# Altium PCB 388D_Control_v1_PCB1_1.PcbDoc (part 2 of 5)
Units mil, origin at the board's own origin, x right, y up, seen from the top; angles counter-clockwise.
Board outline 3431 x 3800 mil, 6 copper layers (Top Layer, Singal Layer 2, Signal layer 3, Signal Layer 4, Signal Layer 5, Bottom Layer), stack 32.7 mil thick; 270 components, 383 nets, 1462 pads, 899 vias.
Unrouted connection lines stored in the file: 19.
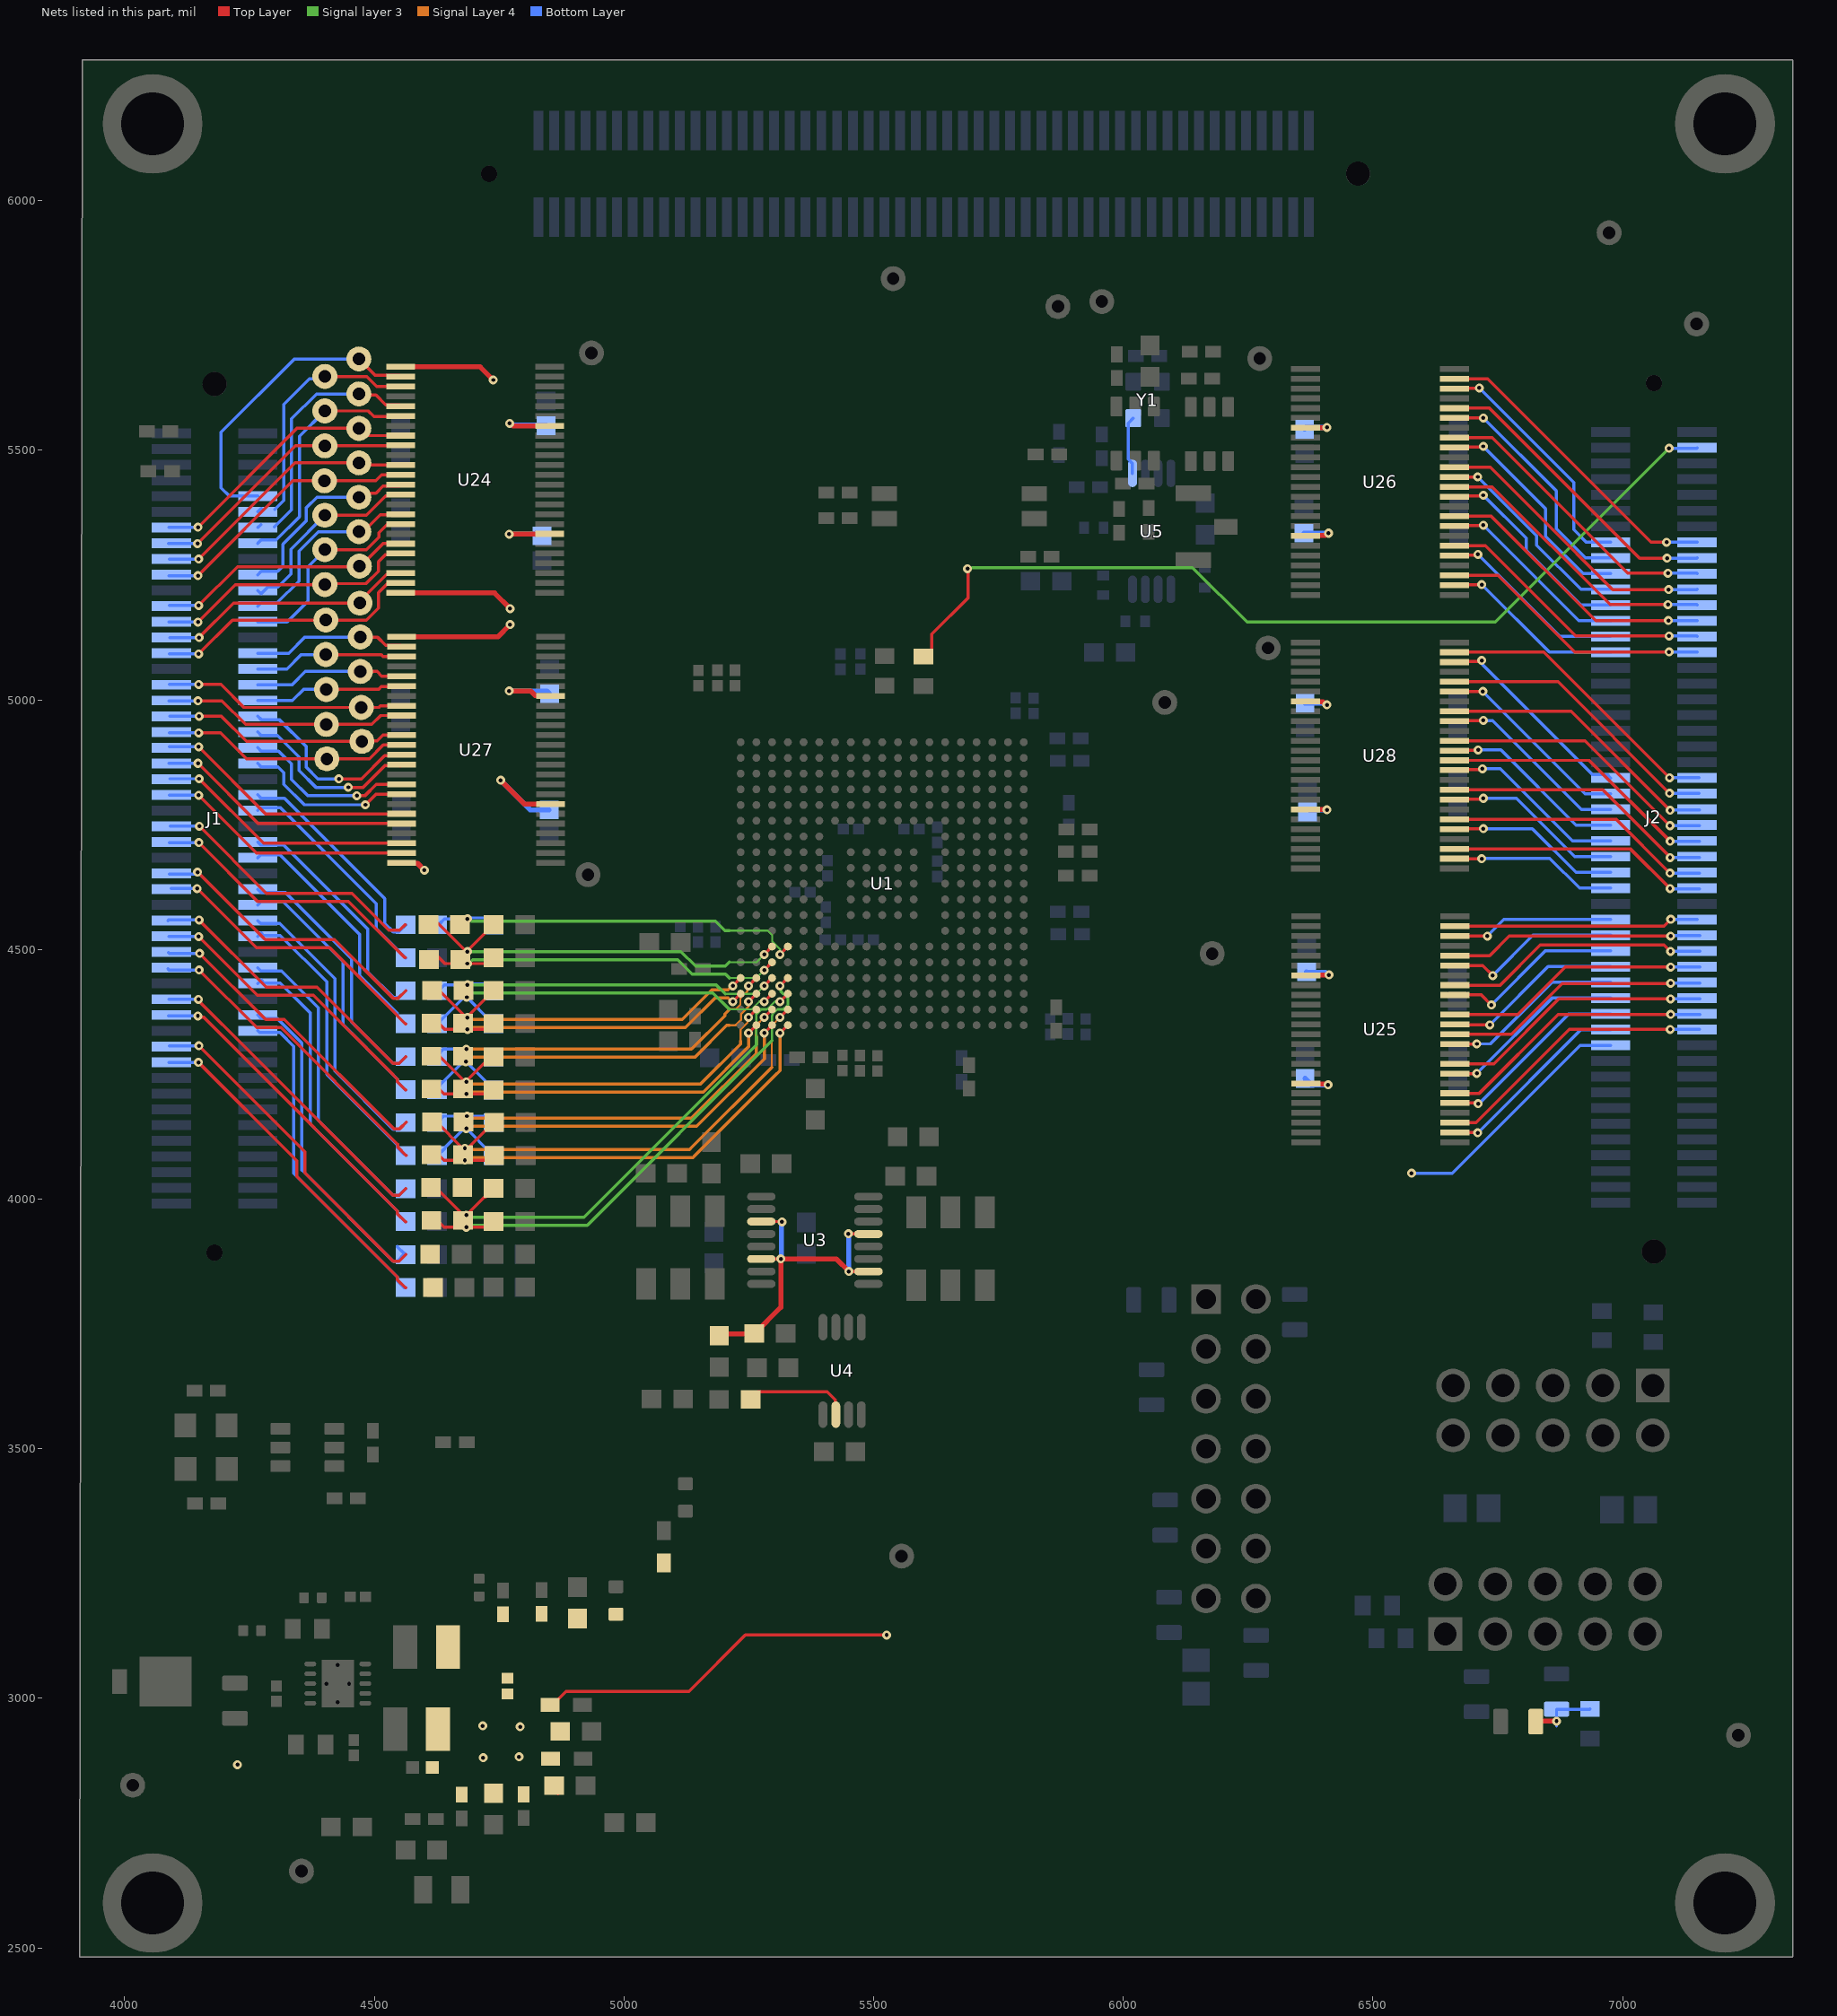
[diagram p5: the nets of this part, all layers, seen from the top]

## Part data
C1 C2 C3 C4 C5 C6 C7 C8 C9 C10 C11 C12 C13 C14 C15 C16 C17 C18 C19 C20 C21 C22 C23 C24: library part CMP-0006920-4, "CAP, CERM, 330 pF, 50 V, +/- 5%, C0G/NP0, 0603"
C25 C30: library part CMP-0006862-5, "CAP, CERM, 0.1 uF, 10 V, +/- 10%, X7R, 0603"
C26 C27 C28 C29 C35 C37: library part CMP-0007324-5, "CAP, CERM, 22 uF, 10 V, +/- 20%, X5R, 0603"
C31: library part CMP-0006907-5, "CAP, CERM, 2.2 uF, 6.3 V, +/- 10%, X5R, 0603"
C32 C33 C34: library part CMP-0006871-4, "CAP, CERM, 1 uF, 6.3 V, +80/-20%, Y5V, 0603"
C36: library part CMP-0006213-2, "CAP, CERM, 33 pF, 25 V, +/- 5%, C0G/NP0, 0402"
C38 C40 C41 C44 C45 C46 C47 C48 C49 C50 C51 C52 C55 C56 C57 C58 C59 C60 C61 C62 C63 C64 C65 C66 C67 C68 C69 C70: library part CMP-001-00001-6, "Chip Capacitor, 0.1 uF, +/- 5%, 16 V, 0402 (1005 Metric)"
C39: library part CMP-001-00081-4, "Chip Capacitor, 22レF +/-40%, 16V, 0805, Thickness 1.45 mm"
C42 C43 C53 C54: library part CMP-0006906-5, "CAP, CERM, 2.2 uF, 10 V, +/- 10%, X5R, 0603"
C71 C72: library part CMP-001-00075-4, "Chip Capacitor, 10レF +/-20%, 10V, 0603, Thickness 1 mm"
C73 C75 C77 C78: library part CMP-0006343-2, "CAP, CERM, 0.1 uF, 10 V, +/- 10%, X7R, 0402"
C74 C76: library part CMP-0006236-2, "CAP, CERM, 0.01 uF, 50 V, +/- 5%, X7R, 0402"
C163 C164 C165: library part CMP-001-00007-7, "Chip Capacitor, 1 uF, +/- 10%, 50 V, 0805 (2012 Metric)"
C166 C167 C168 C169 C170 C171 C172 C173 C174 C175 C176 C177 C178 C179 C180 C181 C182 C183 C184 C185: library part CMP-001-00017-6, "Chip Capacitor, 100 nF, +/- 10%, 50 V, 0603 (1608 Metric)"
D1: "Diode, Schottky, 10 V, 1 A, AEC-Q101, POWERMITE"
D2: library part CMP-004-00069-1, "SURFACE MOUNT SILICON LOW VF SCHOTTKY DIODE 0.5 AMP"
D3 D4: library part CMP-0002951-3, "LED, Red, SMD"
J1 J2 J12: library part CMP-002-00178-1, "Socket(male) 100 Positions, Dual Row, Vertical Receptacle. BergStak Lite 0.80mm, Board-to-Board Connector,"
J9 J10: library part CMP-002-00158-1, "10 Positions Header Connector 0.100\" (2.54mm) Through Hole Gold"
J11: library part CMP-002-00182-1, "Connector Header Through Hole 14 position 0.100 (2.54mm)"
L1 L2: library part CMP-006-00009-6, "Chip Inductor, 2.2 uH, +/- 20%, -55 to 125 degC, 1008 (2520 Metric), RoHS, Tape and Reel"
L3 L4 L5: library part CMP-006-00004-3, "Chip Ferrite Bead for General Use, 120 Ohm, 500 mA, -55 to 125 degC, 0603 (1608 Metric), RoHS, Tape and Reel"
LED1: library part CMP-007-00038-1, "WL-SMCW SMT Mono-Color Chip LED Waterclear 0805"
R3 R4 R5 R6 R7 R8 R59: library part CMP-0026916-3, "RES, 39, 5%, 0.063 W, AEC-Q200 Grade 0, 0402"
R9 R10 R11 R12 R13 R14 R15 R16 R17 R18 R19 R20 R21 R22 R23 R24 R25 R26 R27 R28 R29 R30 R31 R32 R33 R34 R35 R36 R41 R42 R72 R73 R76 R85: library part CMP-0025697-4, "RES, 0, 5%, 0.1 W, AEC-Q200 Grade 0, 0603"
R37 R38 R39 R40: library part CMP-0078660-1, "RES, 0.1, 1%, 0.25 W, 0402"
R43: library part CMP-0022895-5, "RES, 1.00 k, 1%, 0.1 W, 0603"
R44: library part CMP-009-00005-5, "Chip Resistor, 0 Ohm, 0.1 W, -55 to 155 degC, 0402 (1005 Metric)"
R45: library part CMP-009-00081-2, "22K 0.063W 1% 0402 (1005 Metric)  SMD"
R46 R163 R164 R165 R166 R167 R168 R169: library part CMP-009-00006-5, "Chip Resistor, 0 Ohm, 0.1 W, -55 to 155 degC, 0603 (1608 Metric)"
R47 R66 R67: library part CMP-0026962-3, "RES, 680, 5%, 0.063 W, AEC-Q200 Grade 0, 0402"
R48: library part CMP-0026300-2, "RES, 340 k, 1%, 0.063 W, AEC-Q200 Grade 0, 0402"
R49: library part CMP-0026676-1, "RES, 2.00 k, 1%, 0.1 W, AEC-Q200 Grade 0, 0402"
R50: library part CMP-0026160-2, "RES, 205 k, 1%, 0.063 W, AEC-Q200 Grade 0, 0402"
R51: library part CMP-009-00066-2, "10K 0.063W 1% 0402 (1005 Metric)  SMD"
R52: library part CMP-009-00023-5, "Chip Resistor, 100 KOhm, +/- 1%, 0.1 W, -55 to 155 degC, 0603 (1608 Metric)"
R53: library part CMP-009-00163-3, "Chip Resistor, 200 kOhms, +/-1 %, 63 mW, -55 to 155 degC, 0402"
R54: library part CMP-0025557-3, "RES, 75.0 k, 0.5%, 0.1 W, 0603"
R55: library part CMP-0026950-3, "RES, 56, 5%, 0.063 W, AEC-Q200 Grade 0, 0402"
R62 R63 R68 R71 R79 R80: library part CMP-0026890-5, "RES, 2.2 k, 5%, 0.063 W, AEC-Q200 Grade 0, 0402"
R64: library part CMP-0078669-1, "RES, 10.0 k, 1%, 0.063 W, 0402"
R69 R70: library part CMP-0026863-2, "RES, 1.5 M, 5%, 0.063 W, AEC-Q200 Grade 0, 0402"
R74 R75: library part CMP-0026949-3, "RES, 56 k, 5%, 0.063 W, AEC-Q200 Grade 0, 0402"
R77 R78 R81 R83: library part CMP-0026765-1, "RES, 10.0, 0.1%, 0.063 W, 0402"
R82 R84 R86: library part CMP-0081856-1, "RES, 0, 0%, 0.2 W, AEC-Q200 Grade 0, 0402"
R158 R159 R162 R170 R171 R172 R173 R174 R175: library part CMP-009-00174-4, "Chip Resistor, 4,7 Ohms, +/-5 %, 125 mW, -55 to 155 degC, 0805"
R176 R177: library part CMP-0026938-5, "RES, 4.7 k, 5%, 0.063 W, AEC-Q200 Grade 0, 0402"
S1 S2: library part CMP-0002233-1, "Switch, Dual SPDT,  2 Pos, 0.1A, 6VDC, SMD"
S3: library part CMP-0002193-2, "Switch, SPST-NO, Off-Mom, 12 V, SMD"
S4: library part CMP-0002230-1, "Switch, SPST, 2 Pos, 25mA, 24VDC, SMD"
TP1 TP2 TP3 TP4 TP5 TP6 TP7 TP8 TP9 TP10 TP15 TP16 TP17 TP18 TP19 TP20 TP21 TP22 TP23 TP24 TP25 TP26 TP27 TP28 TP29 TP30 TP31 TP32 TP33 TP34 TP35 TP36 TP37 TP38 TP39 TP40 TP41 TP42 TP43: library part CMP-0078143-3, "TEST POINT.  No entry in BOM."
U1: library part CMP-012-000147-1, "TMS320F28388DZWTS, ZWT0337A (NFBGA-337)"
U2: library part CMP-0051789-2, "Dual Buffer/Driver with Open-Drain Output, DBV0006A, LARGE T&R"
U3: library part CMP-014-00004-2, "High-Speed, Single-Supply, Rail-to-Rail Operational Amplifier MicroAmplifier(TM) Series, 2.7 to 5.5 V, -55 to 150 degC, 16-pin SOP (DBQ16), Green (RoHS & no Sb/Br)"
U4: library part CMP-0032596-2, "Low Noise, Very Low Drift, Precision Series Voltage Reference, DGK0008A (VSSOP-8)"
U5: library part CMP-052-000006-1, "Low Jitter, 1:4 LVCMOS Fan-out Clock Buffer, PW0008A (TSSOP-8)"
U6 U7: library part CMP-052-000005-1, "High-Accuracy, Fixed-Threshold OV/UV Monitor, DDC0006A (SOT-23-T-6)"
U8: library part CMP-014-000012-1, "Dual, Adjustable, 600mA and 1000mA, 2.25MHz Step-Down Converter with 1-Wire Interface in QFN 10-VSON -40 to 85"
U24 U25 U26 U27 U28: library part CMP-031-00095-1, "16-Bit Dual-Supply Bus Transceiver"
Y1: library part CMP-052-000000-1, "Oscillator, 25 MHz, 15 pF, SMD"

## Free pads (board coordinates)
  round 200 hole 126 unplated: 2(4056,2590) 2(4056,6154) 2(7205,2590) 2(7205,6154)

## Via types
v1: diameter 18, hole 8, Top Layer to Bottom Layer, tented both sides, 899 vias

## Nets (pads, with @x,y where several pads share a name; then routed paths per layer and width w, separated by ;. In a path a pad name is that pad's centre, name@x,y a point inside that pad or via, vN(x,y) a via of type N, cw(c..) or ccw(c..) an arc to the next point about the centre after c; other vN are vias at no path point)
1V2: C36.1 C37.1 C71.2 D2.2 L2.2 L5.1 R50.2
3V3: C35.1 C42.1 C53.1 C170.1 C171.1 C172.1 C173.1 C178.1 C179.1 C180.1 C181.1 C184.1 C185.1 D2.1 J2.21 L1.2 L3.1 L4.1 R44.2 R47.2 R48.2 U24.1 U24.24 U24.31 U24.42 U25.31 U25.42 U26.31 U26.42 U27.1 U27.24 U27.31 U27.42 U28.31 U28.42 | length 3235.1
  Top Layer w6.25: C53.1@4851,2825.5 4851.98,2825.5 4867.56,2809.92 C53.1@4867.56,2808.94 ; L3.1@4852.02,2987 4856.94,2987 4883.94,3014 5130,3014 5243,3127 v1(5526,3127)
  Top Layer w10: U24.24@4552.72,5214.59 4553.02,5214.3 4740.7,5214.3 v1(4771.9,5183.1) v1@4772,5183 ; U24.1@4552.9,5667.17 4711.83,5667.17 v1(4738,5641) ; U27.24@4554.71,4673.54 4555.62,4672.64 4586.47,4672.64 v1(4600.01,4659.1) ; U27.1@4554.71,5126.3 4747.3,5126.3 v1(4772,5151) ; v1(4753,4839) 4800.34,4791.66 U27.31@4852.98,4791.65 ; v1(4770,5018) 4813,5018 4821.9,5009.1 4852.08,5009.1 U27.42@4852.98,5008.19 ; v1(4770,5332) 4770.35,5332.35 4850.24,5332.35 U24.31@4850.59,5332.7 ; v1(4771,5554) 4773.16,5554 4777.93,5549.24 4848.91,5549.24 U24.42@4848.98,5549.17 ; U28.31@6364.42,4996.74 6365.02,4996.15 6399.69,4996.15 6405.84,4990 v1(6408,4990) ; U28.42@6364.87,4780.52 6365.13,4780.26 6407.74,4780.26 v1(6408,4780) ; U26.31@6364.87,5545.05 6365.24,5545.42 6407.64,5545.42 v1(6408.01,5545.78) ; U26.42@6365.46,5328.52 6366.37,5329.42 6404.16,5329.42 6408.84,5334.1 v1(6411.01,5334.1) ; U25.42@6365.74,4231.82 6366.65,4230.92 6405.92,4230.92 6407.84,4229 v1(6410,4229) ; U25.31@6366.11,4448.73 6411.64,4448.73 v1(6412.01,4449.1)
  Bottom Layer w6.25: v1(6577,4052) 6659,4052 6915.21,4308.21 J2.21@6976.01,4308.21
  Bottom Layer w10: v1(4753,4839) 4812.39,4779.61 C173.1@4850,4779.61 ; v1(4770,5018) 4845.5,5018 C172.1@4851.01,5012.5 ; v1(4770,5332) C170.1@4842.72,5332 ; v1(4771,5554) 4773.16,5554 4776.16,5551 4842.5,5551 C171.1@4844.01,5549.5 ; C179.1@6362.01,5334.18 6362.08,5334.1 v1(6411.01,5334.1) ; C178.1@6363.01,5542.39 6366.4,5545.78 v1(6408.01,5545.78) ; C185.1@6364.01,4241.78 6376.79,4229 v1(6410,4229) ; C180.1@6364.01,4993.39 6402.45,4993.39 6405.84,4990 v1(6408,4990) ; C184.1@6367.01,4455.18 6368.08,4454.1 6404.84,4454.1 6409.84,4449.1 v1(6412.01,4449.1) ; C181.1@6373.19,4780 v1(6408,4780)
  other v1: 4226,2867 4718,2881 4790,2883 4792,2943 4717,2945
25MHZ_CLK: U5.1 Y1.3 | length 118.3
  Bottom Layer w6.25: U5.1@6018.46,5453.94 6018.46,5473.57 6010,5482.03 6010,5554.41 Y1.3@6020.12,5564.53
1415_N: C4.1 R18.1 U1.U4 | length 1023.9
  Top Layer w6: 4625.09,4020.68 4626.07,4020.68 4676.6,3970.15 4682.02,3970.15 v1(4684.32,3967.86) 4720.66,4004.21 4722.65,4004.21 C4.1@4738.35,4019.91
  Top Layer w6.25: v1(5312.45,4395.77) U1.U4@5328.2,4411.52
  Signal layer 3 w4: 5284.09,4380.1 5284.76,4380.77 5287.17,4380.77 5302.17,4395.77 v1(5312.45,4395.77)
  Signal layer 3 w4.74: 5264.83,4325.34 5264.83,4370.95
  Signal layer 3 w5.33: 5264.83,4370.95 5273.82,4379.94 5283.93,4379.94 5284.09,4380.1
  Signal layer 3 w6.25: v1(4684.32,3967.86) 4686.56,3965.61 4692.22,3965.61 4693.85,3963.98 4919.91,3963.98 5264.83,4308.91 5264.83,4325.34
1415_P: C16.1 R17.1 U1.T4 | length 1054
  Top Layer w6.25: 4625.18,3958.32 4639.65,3943.86 v1(4684.32,3943.86) 4726.02,3943.86 C16.1@4740.84,3958.67 ; v1(5312.45,4427.27) U1.T4@5328.2,4443.01
  Signal layer 3 w4: 5296.7,4366.93 5297.45,4367.67 5297.45,4370.49 5306.99,4380.02 5307.81,4380.02
  Signal layer 3 w4.49: 5296.7,4317.8 5296.7,4366.93
  Signal layer 3 w5.5: 5307.81,4380.02 5318.98,4380.02 5328.2,4389.25 5328.2,4402.83
  Signal layer 3 w6.25: v1(4684.32,3943.86) 4686.56,3946.11 4692.22,3946.11 4693.85,3947.73 4926.64,3947.73 5296.7,4317.8 ; v1(5312.45,4427.27) 5314.35,4425.36 5314.35,4415.68 5318.14,4411.89 5319.13,4411.89 5328.2,4402.83
A0A1_N: C1.1 R11.1 U1.T1 | length 745.4
  Top Layer w6: 4628.17,4420.41 4628.17,4419.86 4684.17,4363.86 v1(4686.32,4363.86) 4686.32,4365.54 4741.59,4420.81 C1.1@4741.86,4420.81
  Top Layer w6.25: v1(5217.97,4427.27) U1.T1@5233.71,4443.01
  Signal Layer 4 w6.25: v1(4686.32,4363.86) 4688.56,4361.61 4694.22,4361.61 4695.85,4359.98 5116.4,4359.98 5176.06,4419.64 5208.43,4419.64 5216.05,4427.27 v1(5217.97,4427.27)
A0A1_P: C13.1 R10.1 U1.U1 | length 711.2
  Top Layer w6.25: 4627.18,4354.32 4641.65,4339.86 v1(4686.32,4339.86) 4728.02,4339.86 C13.1@4742.84,4354.67 ; v1(5217.97,4395.77) U1.U1@5233.71,4411.52
  Signal Layer 4 w6.25: v1(4686.32,4339.86) 4688.56,4342.11 4694.22,4342.11 4695.85,4343.73 5123.13,4343.73 5182.79,4403.39 5208.43,4403.39 5216.05,4395.77 v1(5217.97,4395.77)
A2A3_N: C2.1 R13.1 U1.T2 | length 771.4
  Top Layer w6.25: v1(5249.46,4427.27) U1.T2@5265.21,4443.01
  Signal Layer 4 w4: 5210.99,4380.1 5211.66,4380.77 5224.18,4380.77 5232.97,4389.56 5232.97,4402.08 5247.2,4416.31 5247.2,4425 v1@5247.56,4425.36
  Signal Layer 4 w6.25: v1(4684.43,4300.32) 5135.05,4300.32 5201.84,4367.11 5201.84,4370.95 5210.99,4380.1 ; v1@5247.56,4425.36 v1(5249.46,4427.27)
  Bottom Layer w6: v1(4684.43,4300.32) 4718.15,4300.32 4718.33,4300.14 4722.87,4300.14 C2.1@4735.39,4287.62
  Bottom Layer w6.25: R13.1@4628.14,4289.94 4638.52,4300.32 v1(4684.43,4300.32)
A2A3_P: C14.1 R12.1 U1.U2 | length 809
  Top Layer w6.25: v1(5249.46,4395.77) U1.U2@5265.21,4411.52
  Signal Layer 4 w4: 5223.88,4348.98 5234.09,4359.18
  Signal Layer 4 w4.54: 5234.09,4359.18 5234.09,4370.5 5249.46,4385.87 v1(5249.46,4395.77)
  Signal Layer 4 w4.74: 5211.29,4348.15 5223.05,4348.15 5223.88,4348.98
  Signal Layer 4 w6.25: v1(4683.32,4275.47) 4684.25,4275.47 4692.85,4284.07 5141.78,4284.07 5205.98,4348.27 5211.16,4348.27 5211.29,4348.15
  Bottom Layer w6: R12.1@4625.06,4222.92 4675.31,4273.17 4681.02,4273.17 v1(4683.32,4275.47) 4733.11,4225.67 C14.1@4740.84,4225.67
A4A5_N: C3.1 R15.1 U1.T3 | length 729.9
  Top Layer w6.25: v1(5280.96,4427.27) U1.T3@5296.7,4443.01
  Signal layer 3 w4: 5202.82,4411.09 5264.78,4411.09 v1(5280.96,4427.27)
  Signal layer 3 w6.25: v1(4686.43,4429.32) 5184.59,4429.32 5202.82,4411.09
  Bottom Layer w6: v1(4686.43,4429.32) 4688.54,4431.43 4721.19,4431.43 C3.1@4723.04,4433.29
  Bottom Layer w6.25: R15.1@4630.14,4418.94 4640.52,4429.32 v1(4686.43,4429.32)
A4A5_P: C15.1 R14.1 U1.U3 | length 800.5
  Top Layer w6.25: v1(5280.96,4395.77) U1.U3@5296.7,4411.52
  Signal layer 3 w4: 5210.53,4380.4 5256.07,4380.4 5271.44,4395.77 v1(5280.96,4395.77)
  Signal layer 3 w6.25: v1(4685.32,4404.47) 4686.25,4404.47 4694.85,4413.07 5177.86,4413.07 5210.53,4380.4
  Bottom Layer w6: R14.1@4626.07,4351.92 4627.06,4351.92 4677.31,4402.17 4683.02,4402.17 v1(4685.32,4404.47) 4735.11,4354.67 C15.1@4742.84,4354.67
ADC_3V0_REF: R42.2 U4.6 | length 221.4
  Top Layer w6.25: R42.2@5253.45,3598.9 5268.55,3614 5406.96,3614 5422.88,3598.08 5422.88,3560.67 U4.6@5424.09,3559.46
ADC_A0A1_N: J1.58 R11.2 | length 585.4
  Top Layer w6.25: v1(4146.01,4655.1) 4281.42,4519.69 4420.42,4519.69 4537.52,4402.59 4548.09,4402.59 4562.92,4417.42
  Bottom Layer w6.25: J1.58@4089.9,4651.1 4138.83,4651.1 4142.83,4655.1 v1(4146.01,4655.1)
ADC_A0A1_P: J1.60 R10.2 | length 583
  Top Layer w6.25: v1(4145.01,4622.1) 4263.67,4503.44 4410.76,4503.44 4546.36,4367.85 4546.36,4366.93 4562.22,4351.06 4563.14,4351.06
  Bottom Layer w6.25: J1.60@4092.9,4622.1 v1(4145.01,4622.1)
ADC_A2A3_N: J1.59 R13.2 | length 520
  Bottom Layer w6.25: J1.59@4266.7,4620.93 4273.41,4614.21 4321.9,4614.21 4454.01,4482.1 4454.01,4355.78 4537.52,4272.27 4549.9,4272.27 R13.2@4562.92,4285.28
ADC_A2A3_P: J1.61 R12.2 | length 532.4
  Bottom Layer w6.25: J1.61@4266.7,4589.43 4273.37,4596.1 4317.01,4596.1 4437.01,4476.1 4437.01,4349.8 4530.79,4256.02 4546.36,4240.45 4546.36,4234.77 4561.91,4219.22 R12.2@4562.92,4219.19
ADC_A4A5_N: J1.53 R15.2 | length 480.9
  Bottom Layer w6.25: J1.53@4266.7,4715.41 4273.01,4709.1 4319.01,4709.1 4487.01,4541.1 4487.01,4454.93 4537.52,4404.42 4549.92,4404.42 R15.2@4562.92,4417.42
ADC_A4A5_P: J1.55 R14.2 | length 490.5
  Bottom Layer w6.25: J1.55@4266.7,4683.92 4272.88,4690.1 4273.65,4689.33 4311.78,4689.33 4470.76,4530.35 4470.76,4448.2 4546.36,4372.6 4546.36,4366.93 4561.93,4351.35 R14.2@4562.92,4351.35
ADC_B0B1_N: J1.66 R20.2 | length 604.5
  Top Layer w6.25: v1(4148.01,4526.1) 4265.63,4408.48 4378.33,4408.48 4529.81,4257 4546.36,4240.45 4546.36,4234.77 4561.93,4219.19 4562.92,4219.19
  Bottom Layer w6.25: J1.66@4088.9,4526.1 v1(4148.01,4526.1)
ADC_B0B1_P: J1.64 R19.2 | length 600.6
  Top Layer w6.25: v1(4149.01,4559.1) 4283.38,4424.73 4385.06,4424.73 4537.52,4272.27 4549.91,4272.27 4562.92,4285.28
  Bottom Layer w6.25: J1.64@4086.9,4558.1 4087.9,4559.1 v1(4149.01,4559.1)
ADC_B2B3_N: J1.65 R22.2 | length 590.6
  Bottom Layer w6.25: J1.65@4266.7,4526.44 4273.41,4533.15 4278.22,4528.35 4311.78,4528.35 4404.76,4435.37 4404.76,4249.93 4530.11,4124.58 4546.36,4108.33 4546.36,4102.66 R22.2@4558.98,4090.05
ADC_B2B3_P: J1.63 R21.2 | length 583.3
  Bottom Layer w6.25: J1.63@4266.7,4557.93 4272.44,4552.19 4310.92,4552.19 4421.01,4442.1 4421.01,4256.66 4537.52,4140.15 4549.92,4140.15 R21.2@4562.92,4153.15
ADC_B4B5_N: J1.70 R24.2 | length 634.9
  Top Layer w6.25: v1(4149.01,4459.1) 4264.63,4343.48 4313.21,4343.48 4531.13,4125.55 4543.72,4112.96 4547.38,4109.3 4547.38,4103.62 4562.96,4088.04 4563.94,4088.04
  Bottom Layer w6.25: J1.70@4086.9,4461.1 4088.9,4459.1 v1(4149.01,4459.1)
ADC_B4B5_P: J1.68 R23.2 | length 627.6
  Top Layer w6.25: v1(4150.01,4492.1) 4282.38,4359.73 4319.94,4359.73 4538.54,4141.12 4550.93,4141.12 4563.94,4154.13
  Bottom Layer w6.25: J1.68@4087.9,4494.1 4089.9,4492.1 v1(4150.01,4492.1)
ADC_C2C3_N: J1.52 R27.2 | length 562.1
  Top Layer w6.25: v1(4149.59,4747.1) 4283.96,4612.73 4455.05,4612.73 4529.18,4538.6 4550.51,4538.6 4561.9,4549.98
  Bottom Layer w6.25: J1.52@4090.9,4747.1 v1(4149.59,4747.1)
ADC_C2C3_P: J1.54 R26.2 | length 567.3
  Top Layer w6.25: v1(4148.59,4714.1) 4266.21,4596.48 4448.32,4596.48 4560.91,4483.89 4561.9,4483.89
  Bottom Layer w6.25: J1.54@4089.9,4714.1 v1(4148.59,4714.1)
ADC_C4C5_N: J1.47 R29.2 | length 444.9
  Bottom Layer w6.25: J1.47@4266.7,4809.9 4273.41,4803.18 4306.52,4803.18 4306.6,4803.1 4320.01,4803.1 4521.01,4602.1 4521.01,4552.1 4537.52,4535.59 4548.96,4535.59 R29.2@4562.92,4549.55
ADC_C4C5_P: J1.49 R28.2 | length 452.8
  Bottom Layer w6.25: J1.49@4266.7,4778.4 4272.39,4784.1 4312.01,4784.1 4504.01,4592.1 4504.01,4542.39 4546.36,4500.04 4546.36,4499.06 4561.93,4483.48 R28.2@4562.92,4483.48
ADC_D0D1_N: J1.71 R32.2 | length 632.9
  Bottom Layer w6.25: J1.71@4266.7,4431.95 4273.41,4438.67 4279.03,4433.05 4311.78,4433.05 4371.76,4373.08 4371.76,4150.8 4542.7,3979.86 4546.36,3976.2 4546.36,3970.53 4561.93,3954.96 R32.2@4562.92,3954.96
ADC_D0D1_P: J1.69 R31.2 | length 622.4
  Bottom Layer w6.25: J1.69@4266.7,4463.44 4273.04,4457.1 4314.01,4457.1 4388.01,4383.1 4388.01,4157.53 4537.52,4008.02 4549.92,4008.02 R31.2@4562.92,4021.02
ADC_D2D3_N: J1.77 R34.2 | length 659.9
  Bottom Layer w6.25: J1.77@4266.7,4337.46 4270.46,4333.7 4311.08,4333.7 4338.76,4306.02 4338.76,4051.66 4342.14,4048.27 4530.11,3860.31 4546.36,3844.06 4546.36,3836.41 R34.2@4559.97,3822.8
ADC_D2D3_P: J1.75 R33.2 | length 677.5
  Bottom Layer w6.25: J1.75@4266.7,4368.96 4273.41,4362.24 4305.52,4362.24 4355.01,4312.75 4355.01,4058.39 4358.39,4055 4537.52,3875.88 4546.36,3875.88 4559.97,3889.49 R33.2@4559.97,3890.86 ; R33.2@4546.36,3905.45 4546.36,3904.47 R33.2@4559.97,3890.86 ; R33.2@4562.92,3888.89 4560.95,3890.86 R33.2@4559.97,3890.86
ADC_D4D5_N: J1.82 R36.2 | length 682.6
  Top Layer w6.25: v1(4147.59,4274.1) 4344.76,4076.93 4344.76,4045.67 4529.81,3860.62 4546.36,3844.07 4546.36,3838.4 4561.93,3822.83 4562.92,3822.83
  Bottom Layer w6.25: J1.82@4088.9,4274.1 v1(4147.59,4274.1)
ADC_D4D5_P: J1.80 R35.2 | length 681.8
  Top Layer w6.25: v1(4148.59,4307.1) 4361.01,4094.68 4361.01,4052.4 4537.52,3875.89 4549.92,3875.89 4562.92,3888.89
  Bottom Layer w6.25: J1.80@4089.9,4307.1 v1(4148.59,4307.1)
ADC_IN1415_N: J1.74 R18.2 | length 643.1
  Top Layer w6.25: v1(4147.59,4400.1) 4147.59,4397.94 4246.59,4298.94 4537.52,4008.01 4549.91,4008.01 4562.92,4021.02
  Bottom Layer w6.25: J1.74@4088.9,4400.1 v1(4147.59,4400.1)
ADC_IN1415_P: J1.76 R17.2 | length 649.1
  Top Layer w6.25: v1(4146.59,4367.1) 4148.84,4364.85 4157.69,4364.85 4230.34,4292.21 4530.79,3991.76 4542.7,3979.85 4546.36,3976.19 4546.36,3970.51 4561.93,3954.93 4562.92,3954.93
  Bottom Layer w6.25: J1.76@4087.9,4367.1 v1(4146.59,4367.1)
ADC_REF: C33.1 R43.2 U3.2 U3.5 U3.11 U3.14 | length 703.3
  Top Layer w6.25: U3.14@5275.03,3880.15 v1(5314.31,3880.13) ; U3.11@5275.03,3955.15 5315.81,3955.15 v1(5316.31,3954.65) ; v1(5449.31,3930.65) 5449.81,3930.15 U3.5@5489.6,3930.15 ; v1(5450.31,3855.13) U3.2@5489.6,3855.15
  Top Layer w10: R43.2@5187.95,3730.39 5260.45,3730.39 C33.1@5260.95,3730.9 5261.94,3730.9 5314.31,3783.27 v1(5314.31,3880.13) 5425.31,3880.13 v1(5450.31,3855.13)
  Bottom Layer w10: v1(5314.31,3880.13) 5315.31,3881.13 5315.31,3953.65 v1(5316.31,3954.65) ; v1(5449.31,3930.65) 5449.81,3930.15 5449.81,3855.63 v1(5450.31,3855.13)
B0B1_N: C5.1 R20.1 U1.W2 | length 781.6
  Top Layer w6.25: 4625.18,4225.32 4639.65,4210.86 v1(4684.32,4210.86) 4726.02,4210.86 C5.1@4740.84,4225.67 ; v1(5249.46,4332.78) U1.W2@5265.21,4348.52
  Signal Layer 4 w6.25: v1(4684.32,4210.86) 4686.56,4213.11 4692.22,4213.11 4693.85,4214.73 5158.64,4214.73 5249.33,4305.42 5249.33,4332.64 v1(5249.46,4332.78)
B0B1_P: C17.1 R19.1 U1.V2 | length 828.3
  Top Layer w6: 4626.17,4291.41 4626.17,4290.86 4682.17,4234.86 v1(4684.32,4234.86) 4684.32,4236.54 4739.59,4291.81 C17.1@4739.86,4291.81
  Top Layer w6.25: v1(5249.46,4364.27) U1.V2@5265.21,4380.02
  Signal Layer 4 w4: 5233.4,4317.03 5233.4,4339.5 5247.21,4353.31 5247.21,4362.03 v1(5249.46,4364.27)
  Signal Layer 4 w6.25: v1(4684.32,4234.86) 4686.56,4232.61 4692.22,4232.61 4693.85,4230.98 5153.89,4230.98 5233.4,4310.5 5233.4,4317.03
B2B3_N: C6.1 R22.1 U1.W3 | length 889.1
  Top Layer w6.25: v1(5280.96,4332.78) U1.W3@5296.7,4348.52
  Signal Layer 4 w6.25: v1(4684.32,4141.47) 4687.49,4141.47 4691.8,4145.77 5145.68,4145.77 5280.96,4281.05 v1(5280.96,4332.78)
  Bottom Layer w6: R22.1@4625.09,4086.78 4626.07,4086.78 4641.77,4102.48 4641.77,4103.46 4677.49,4139.17 4682.02,4139.17 v1(4684.32,4141.47) 4734.11,4091.67 C6.1@4741.84,4091.67
B2B3_P: C18.1 R21.1 U1.V3 | length 861
  Top Layer w6.25: v1(5280.96,4364.27) U1.V3@5296.7,4380.02
  Signal Layer 4 w4: 5264.71,4327.53 5264.71,4348.02 v1(5280.96,4364.27)
  Signal Layer 4 w6.25: v1(4685.43,4166.32) 4688.61,4166.32 4692.91,4162.02 5134.93,4162.02 5264.71,4291.8 5264.71,4327.53
  Bottom Layer w6: v1(4685.43,4166.32) 4724.2,4166.32 C18.1@4738.35,4152.17
  Bottom Layer w6.25: R21.1@4625.09,4152.87 4638.54,4166.32 v1(4685.43,4166.32)
B4B5_N: C7.1 R24.1 U1.W4 | length 930
  Top Layer w6.25: 4626.18,4091.32 4639.67,4077.83 v1(4681.35,4077.83) 4728,4077.83 C7.1@4741.84,4091.67 ; v1(5312.45,4332.78) U1.W4@5328.2,4348.52
  Signal Layer 4 w6.25: v1(4681.35,4077.83) 4684.53,4077.83 4690.04,4083.34 5138.22,4083.34 5141.36,4086.47 5302.93,4248.05 5312.45,4257.57 v1(5312.45,4332.78)
B4B5_P: C19.1 R23.1 U1.V4 | length 969.8
  Top Layer w6: 4625.09,4152.87 4626.07,4152.87 4674.81,4104.13 4679.06,4104.13 v1(4681.35,4101.83) 4683.65,4104.13 4689.32,4104.13 4737.36,4152.17 C19.1@4738.35,4152.17
  Top Layer w6.25: v1(5312.45,4364.27) U1.V4@5328.2,4380.02
  Signal Layer 4 w4: 5296.2,4264.3 5296.2,4348.02 v1(5312.45,4364.27)
  Signal Layer 4 w6.25: v1@4679.78,4101.83 4682.03,4099.59 5131.49,4099.59 5134.63,4102.72 5296.2,4264.3
bMCU_GPIO0: J1.9 TP15.1 U24.2 | length 627
  Top Layer w6.25: TP15.1@4469,5683 4501.56,5650.44 4549.94,5650.44 U24.2@4552.72,5647.66
  Bottom Layer w6.25: J1.9@4266.7,5408.33 4209.67,5408.33 4193,5425 4193,5536.2 4339.8,5683 TP15.1@4469,5683
bMCU_GPIO1: J1.11 TP16.1 U24.3 | length 492.2
  Top Layer w6.25: TP16.1@4401,5648 4485,5648 4505.02,5627.98 U24.3@4552.72,5627.98
  Bottom Layer w6.25: J1.11@4266.7,5376.83 J1.11@4273.41,5383.55 ; J1.11@4301,5382 4319,5400 4319,5592 4370.29,5643.29 4396.29,5643.29 TP16.1@4401,5648
bMCU_GPIO2: J1.13 TP17.1 U24.5 | length 488.3
  Top Layer w6.25: TP17.1@4469,5613 4471.37,5610.63 4503.38,5610.63 4522.61,5591.39 4549.94,5591.39 U24.5@4552.72,5588.61
  Bottom Layer w6.25: J1.13@4266.7,5345.34 J1.13@4272.86,5351.5 ; J1.13@4300,5347 4334,5381 4334,5563 4384,5613 TP17.1@4469,5613
bMCU_GPIO3: J1.15 TP19.1 U24.6 | length 495.1
  Top Layer w6.25: TP19.1@4401,5579 4488,5579 4499,5568 4551.8,5568 U24.6@4552.72,5568.92
  Bottom Layer w6.25: J1.15@4266.7,5313.84 4273.41,5320.56 4303.56,5320.56 4350,5367 4350,5528 TP19.1@4401,5579
bMCU_GPIO4: J1.14 TP18.1 U24.8 | length 552.4
  Top Layer w6.25: v1(4147.01,5346.1) 4344.91,5544 TP18.1@4469,5544 4474.92,5544 4489.37,5529.55 U24.8@4552.72,5529.55
  Bottom Layer w6.25: J1.14@4088.32,5346.1 v1(4147.01,5346.1)
bMCU_GPIO5: J1.16 TP20.1 U24.9 | length 550.4
  Top Layer w6.25: v1(4146.01,5313.1) 4341.91,5509 TP20.1@4401,5509 U24.9@4552.7,5509 ; U24.9@4549.94,5512.65 U24.9@4552.72,5509.87
  Bottom Layer w6.25: J1.16@4087.32,5313.1 v1(4146.01,5313.1)
bMCU_GPIO6: J1.18 TP21.1 U24.11 | length 555.1
  Top Layer w6.25: v1(4148.01,5282.1) 4340.91,5475 TP21.1@4469,5475 TP21.1@4473.5,5470.5 ; TP21.1@4469,5470.5 TP21.1@4473.5,5470.5 ; TP21.1@4477.37,5466.63 TP21.1@4473.5,5470.5 ; U24.11@4552.72,5470.5 TP21.1@4473.5,5470.5
  Bottom Layer w6.25: J1.18@4089.32,5282.1 v1(4148.01,5282.1)
bMCU_GPIO7: J1.20 TP23.1 U24.12 | length 548
  Top Layer w6.25: v1(4147.01,5249.1) 4336.91,5439 TP23.1@4400,5439 4503,5439 4514.81,5450.81 U24.12@4552.72,5450.81
  Bottom Layer w6.25: J1.20@4088.32,5249.1 v1(4147.01,5249.1)
bMCU_GPIO8: J1.19 TP22.1 U24.13 | length 400.1
  Top Layer w6.25: TP22.1@4469,5406 4477.37,5414.37 4503.37,5414.37 4517.35,5428.35 4549.94,5428.35 U24.13@4551.6,5430
  Bottom Layer w6.25: J1.19@4266.7,5250.85 4273.41,5257.56 4306.56,5257.56 4317,5268 4317,5312 4364,5359 4364,5385 4385,5406 TP22.1@4469,5406
bMCU_GPIO9: J1.21 TP24.1 U24.14 | length 383.5
  Top Layer w6.25: TP24.1@4401,5370 4484,5370 4522.66,5408.66 4526.81,5408.66 4528,5409.85 U24.14@4528,5414 ; U24.14@4548.17,5410 U24.14@4551.17,5413
  Bottom Layer w6.25: J1.21@4266.7,5219.35 4273.41,5212.63 4286.85,5226.07 4307.07,5226.07 4333,5252 4333,5302 TP24.1@4401,5370
bMCU_GPIO10: J1.23 TP25.1 U24.16 | length 373.6
  Top Layer w6.25: TP25.1@4469,5337 4478,5337 4512,5371 U24.16@4529.33,5371
  Bottom Layer w6.25: J1.23@4266.7,5187.85 4273.41,5194.57 4305.57,5194.57 4349,5238 4349,5298 4388,5337 TP25.1@4469,5337
bMCU_GPIO11: J1.25 TP27.1 U24.17 | length 413.5
  Top Layer w6.25: TP27.1@4401,5301 4484,5301 4509,5326 4509,5335 4526.36,5352.36 U24.17@4552.72,5352.39 U24.17@4552.31,5351.97
  Bottom Layer w6.25: J1.25@4266.7,5156.36 4325.36,5156.36 4367,5198 4367,5267 TP27.1@4401,5301
bMCU_GPIO12: J1.24 TP26.1 U24.19 | length 528
  Top Layer w6.25: v1(4148.01,5189.1) 4225.91,5267 4471,5267 TP26.1@4480,5276 ; TP26.1@4470,5268 4478,5276 TP26.1@4480,5276 ; U24.19@4552.72,5313.02 4517.02,5313.02 TP26.1@4480,5276
  Bottom Layer w6.25: J1.24@4089.32,5189.1 v1(4148.01,5189.1)
bMCU_GPIO13: J1.26 TP28.1 U24.20 | length 549.8
  Top Layer w6.25: v1(4147.01,5156.1) 4221.91,5231 TP28.1@4401,5231 TP28.1@4403,5233 ; TP28.1@4387,5233 TP28.1@4403,5233 ; TP28.1@4404,5234 TP28.1@4403,5233 ; U24.20@4552.72,5293.33 4549.94,5290.55 4521.55,5290.55 4508,5277 4508,5258 4483,5233 TP28.1@4403,5233
  Bottom Layer w6.25: J1.26@4088.32,5156.1 v1(4147.01,5156.1)
bMCU_GPIO14: J1.28 TP29.1 U24.22 | length 505.2
  Top Layer w6.25: v1(4149.01,5125.1) 4217.91,5194 TP29.1@4471,5194 TP29.1@4479.57,5194 ; TP29.1@4483.36,5210.36 4524.18,5251.18 4549.94,5251.18 U24.22@4552.72,5253.96
  Bottom Layer w6.25: J1.28@4090.32,5125.1 v1(4149.01,5125.1)
bMCU_GPIO15: J1.30 TP31.1 U24.23 | length 514.2
  Top Layer w6.25: v1(4148.01,5092.1) 4215.91,5160 TP31.1@4403,5160 4484,5160 4508,5184 4508,5215 U24.23@4526,5233 ; U24.23@4552,5235 U24.23@4552.72,5234.28
  Bottom Layer w6.25: J1.30@4089.32,5092.1 v1(4148.01,5092.1)
bMCU_GPIO16: J1.29 TP30.1 U27.2 | length 309.6
  Top Layer w6.25: TP30.1@4472,5126 4506,5126 4522.6,5109.4 4551.93,5109.4 U27.2@4554.71,5106.61
  Bottom Layer w6.25: J1.29@4266.7,5093.37 4328.37,5093.37 4361,5126 TP30.1@4472,5126
bMCU_GPIO17: J1.31 TP32.1 U27.3 | length 301.8
  Top Layer w6.25: TP32.1@4403,5091 4513.28,5091 4517.35,5086.93 U27.3@4554.71,5086.93
  Bottom Layer w6.25: J1.31@4266.7,5061.87 4324.87,5061.87 4354,5091 TP32.1@4403,5091
bMCU_GPIO18: J1.33 TP33.1 U27.5 | length 303.5
  Top Layer w6.25: TP33.1@4472,5057 4505.29,5057 4514.96,5047.33 4554.48,5047.33 U27.5@4554.71,5047.56
  Bottom Layer w6.25: J1.33@4266.7,5030.37 4267.07,5030 4335,5030 4362,5057 TP33.1@4472,5057
bMCU_GPIO19: J1.35 TP35.1 U27.6 | length 302.3
  Top Layer w6.25: TP35.1@4404,5021 4508,5021 4513.99,5026.99 4553.71,5026.99 4554.59,5026.1 4555.56,5026.1 U27.6@4556.56,5025.1
  Bottom Layer w6.25: J1.35@4266.7,4998.88 4335.88,4998.88 4358,5021 TP35.1@4404,5021
bMCU_GPIO20: J1.34 TP34.1 U27.8 | length 485.9
  Top Layer w6.25: v1(4148.01,5031.1) 4192.9,5031.1 4239,4985 TP34.1@4474,4985 4509,4985 4512,4988 4554.21,4988 U27.8@4554.71,4988.5
  Bottom Layer w6.25: J1.34@4089.32,5031.1 v1(4148.01,5031.1)
bMCU_GPIO21: J1.36 TP36.1 U27.9 | length 493.3
  Top Layer w6.25: v1(4147.01,4998.1) 4194.9,4998.1 4242,4951 TP36.1@4404,4951 4495,4951 4512.82,4968.82 U27.9@4554.71,4968.82
  Bottom Layer w6.25: J1.36@4088.32,4998.1 v1(4147.01,4998.1)
bMCU_GPIO22: J1.38 TP37.1 U27.11 | length 490.3
  Top Layer w6.25: v1(4149.01,4967.1) 4193.9,4967.1 4244,4917 TP37.1@4475,4917 4475.98,4917.98 4505.71,4917.98 4517.18,4929.45 U27.11@4554.71,4929.45
  Bottom Layer w6.25: J1.38@4090.32,4967.1 v1(4149.01,4967.1)
bMCU_GPIO23: J1.40 TP38.1 U27.12 | length 498.5
  Top Layer w6.25: v1(4148.01,4934.1) 4191.9,4934.1 4244,4882 TP38.1@4405,4882 4490,4882 4517.77,4909.77 U27.12@4554.71,4909.76
  Bottom Layer w6.25: J1.40@4089.32,4934.1 v1(4148.01,4934.1)
bMCU_GPIO24: J1.37 U27.13 | length 383.9
  Top Layer w6.25: v1(4429,4842) 4474,4842 4520.54,4888.54 4553.17,4888.54 U27.13@4554.71,4890.08
  Bottom Layer w6.25: J1.37@4266.7,4967.38 4273.41,4960.66 4309.34,4960.66 4364,4906 4364,4865 4387,4842 v1(4429,4842)
bMCU_GPIO25: J1.39 U27.14 | length 370.9
  Top Layer w6.25: v1(4448,4825) 4478,4825 4521.2,4868.2 4546.96,4868.2 4549.15,4870.4 4551.93,4867.61 U27.14@4554.71,4870.39
  Bottom Layer w6.25: J1.39@4266.7,4935.89 4273.41,4929.17 4305.83,4929.17 4349,4886 4349,4859 4383,4825 v1(4448,4825)
bMCU_GPIO26: J1.41 U27.16 | length 355.6
  Top Layer w6.25: v1(4465,4808) 4481,4808 4504,4831 U27.16@4554.71,4831.02
  Bottom Layer w6.25: J1.41@4266.7,4904.39 4273.41,4897.67 4308.33,4897.67 4334,4872 4334,4841 4367,4808 v1(4465,4808)
bMCU_GPIO27: J1.43 U27.17 | length 344.7
  Top Layer w6.25: v1(4482,4790) 4503.34,4811.34 U27.17@4554.71,4811.34
  Bottom Layer w6.25: J1.43@4266.7,4872.89 4273.41,4866.18 4306.82,4866.18 4319,4854 4319,4831 4360,4790 v1(4482,4790)
bMCU_GPIO28: J1.42 U27.19 | length 520.9
  Top Layer w6.25: v1(4148.01,4906.1) 4282.14,4771.97 U27.19@4554.71,4771.97
  Bottom Layer w6.25: J1.42@4089.32,4906.1 v1(4148.01,4906.1)
bMCU_GPIO29: J2.53 U28.19 | length 398.6
  Top Layer w6.25: U28.19@6662.31,5016.76 6662.42,5016.87 6719.87,5016.87 v1(6720,5017)
  Bottom Layer w6.25: v1(6720,5017) 6924.85,4812.15 J2.53@6976.01,4812.15
bMCU_GPIO30: J1.46 U27.22 | length 517.9
  Top Layer w6.25: v1(4149.01,4842.1) 4278.19,4712.92 U27.22@4554.71,4712.91
  Bottom Layer w6.25: J1.46@4090.32,4842.1 v1(4149.01,4842.1)
bMCU_GPIO31: J1.48 U27.23 | length 513.4
  Top Layer w6.25: v1(4148.01,4809.1) 4263.88,4693.23 U27.23@4554.71,4693.23
  Bottom Layer w6.25: J1.48@4089.32,4809.1 v1(4148.01,4809.1)
bMCU_GPIO35: J2.23 U25.2 | length 400.3
  Top Layer w6.25: U25.2@6662.01,4134.45 6662.78,4133.68 6709.07,4133.68 v1(6709.85,4132.9)
  Bottom Layer w6.25: v1(6709.85,4132.9) 6916.65,4339.71 J2.23@6976.01,4339.71
bMCU_GPIO36: J2.24 U25.3 | length 567.4
  Top Layer w6.25: U25.3@6664.01,4153.08 6706.08,4153.08 6893.1,4340.1 v1@7095.01,4340.1
  Bottom Layer w6.25: v1@7095.01,4340.1 v1(7095.11,4340) 7095.21,4339.9 J2.24@7153.83,4339.9
bMCU_GPIO37: J2.26 U25.6 | length 580.6
  Top Layer w6.25: U25.6@6639.78,4212.14 U25.6@6664.01,4212.14 6713.14,4212.14 6871.1,4370.1 v1@7096.01,4370.1
  Bottom Layer w6.25: v1@7096.01,4370.1 v1(7096.11,4370) 7096.21,4369.9 J2.26@7154.83,4369.9
bMCU_GPIO38: J2.27 U25.8 | length 374.6
  Top Layer w6.25: U25.8@6664.01,4251.51 6707.51,4251.51 v1(6708,4252)
  Bottom Layer w6.25: v1(6708,4252) 6858.7,4402.7 J2.27@6976.01,4402.7
bMCU_GPIO45: J2.45 U28.8 | length 362.5
  Top Layer w6.25: U28.8@6663.14,4800.05 6664.69,4801.6 6719.6,4801.6 v1(6721,4803)
  Bottom Layer w6.25: v1(6721,4803) 6787,4803 6903.83,4686.17 J2.45@6976.01,4686.17
bMCU_GPIO51: J2.55 U28.22 | length 414.6
  Top Layer w6.25: U28.22@6664.22,5075.85 6665.77,5077.4 6716.4,5077.4 v1(6718,5079)
  Bottom Layer w6.25: v1(6718,5079) 6720.25,5076.75 6720.25,5069.88 6939.95,4850.18 6969.47,4850.18 J2.55@6976.01,4843.65
bMCU_GPIO52: J2.37 U25.22 | length 327.1
  Top Layer w6.25: U25.22@6664.01,4527.1 v1(6729,4527.1) 6729.1,4527.1 v1@6730,4528
  Bottom Layer w6.25: v1(6729,4527.1) 6762.08,4560.18 J2.37@6976.01,4560.18
bMCU_GPIO53: J2.38 U25.23 | length 491.7
  Top Layer w6.25: U25.23@6664.01,4546.78 7082.6,4546.78 v1(7096.41,4560.59)
  Bottom Layer w6.25: v1@7096,4561 v1(7096.41,4560.59) 7096.82,4560.18 J2.38@7149.24,4560.18
bMCU_GPIO54: J2.36 U25.20 | length 507.4
  Top Layer w6.25: U25.20@6664.01,4487.73 6733.73,4487.73 6773.1,4527.1 v1(7096.01,4527.1)
  Bottom Layer w6.25: v1(7096.01,4527.1) 7096.6,4527.69 J2.36@7154.83,4527.69
bMCU_GPIO55: J2.46 U28.9 | length 549.2
  Top Layer w6.25: U28.9@6663.14,4819.89 6960.23,4819.89 7096.01,4684.1 v1(7095.01,4684.1)
  Bottom Layer w6.25: v1(7095.01,4684.1) 7095.6,4684.69 J2.46@7153.83,4684.69
bMCU_GPIO56: J2.44 U28.6 | length 535.3
  Top Layer w6.25: U28.6@6663.14,4760.83 6987.28,4760.83 v1(7094.91,4653.2)
  Bottom Layer w6.25: v1(7094.91,4653.2) J2.44@7153.83,4653.2
bMCU_GPIO57: J2.54 U28.20 | length 582.3
  Top Layer w6.25: U28.20@6663.14,5036.42 6870.69,5036.42 v1(7094.01,4813.1)
  Bottom Layer w6.25: v1(7094.01,4813.1) 7094.21,4812.9 J2.54@7152.83,4812.9
bMCU_GPIO60: J2.28 U25.9 | length 544.7
  Top Layer w6.25: U25.9@6664.01,4271.19 6742.19,4271.19 6872.2,4401.2 v1(7095.91,4401.2)
  Bottom Layer w6.25: v1(7095.91,4401.2) J2.28@7154.83,4401.2
bMCU_GPIO61: J2.29 U25.11 | length 363.2
  Top Layer w6.25: U25.11@6664.01,4310.56 6707.56,4310.56 v1(6708,4311)
  Bottom Layer w6.25: v1(6708,4311) 6735,4311 6858.2,4434.2 J2.29@6976.01,4434.2
bMCU_GPIO62: J2.30 U25.12 | length 533.3
  Top Layer w6.25: U25.12@6664.01,4330.25 6777.25,4330.25 6879.1,4432.1 v1@7096.01,4432.1
  Bottom Layer w6.25: v1@7096.01,4432.1 v1(7096.3,4432.4) 7096.6,4432.69 J2.30@7154.83,4432.69
bMCU_GPIO63: J2.31 U25.13 | length 360.7
  Top Layer w6.25: U25.13@6664.01,4349.93 6664.47,4349.47 6733.53,4349.47 v1(6734,4349)
  Bottom Layer w6.25: v1(6734,4349) 6850.69,4465.69 J2.31@6976.01,4465.69
bMCU_GPIO64: J2.32 U25.14 | length 530.5
  Top Layer w6.25: U25.14@6664.01,4369.62 6789.62,4369.62 6885.1,4465.1 v1(7096.01,4465.1)
  Bottom Layer w6.25: v1(7096.01,4465.1) 7096.21,4464.9 J2.32@7154.83,4464.9
bMCU_GPIO65: J2.33 U25.16 | length 365.1
  Top Layer w6.25: U25.16@6664.01,4408.99 6717.01,4408.99 v1(6737,4389)
  Bottom Layer w6.25: v1(6737,4389) 6845.19,4497.19 J2.33@6976.01,4497.19
bMCU_GPIO66: J2.34 U25.17 | length 529.4
  Top Layer w6.25: U25.17@6664.01,4428.67 6754.67,4428.67 6835,4509 7083.11,4509 v1(7095.91,4496.2)
  Bottom Layer w6.25: v1(7095.91,4496.2) J2.34@7154.83,4496.2
bMCU_GPIO67: J2.35 U25.19 | length 353.7
  Top Layer w6.25: U25.19@6664.01,4468.04 6719.96,4468.04 v1(6740,4448)
  Bottom Layer w6.25: v1(6740,4448) 6820.68,4528.68 J2.35@6976.01,4528.68
bMCU_GPIO68: J2.79 U26.13 | length 424.9
  Top Layer w6.25: U26.13@6663.14,5446.62 6709.57,5446.62 v1(6709.85,5446.9)
  Bottom Layer w6.25: v1@6702,5446.62 6709.85,5446.62 6828.01,5328.46 6828.01,5309.99 6916.4,5221.6 J2.79@6976.01,5221.6
bMCU_GPIO69: J2.80 U26.14 | length 588
  Top Layer w6.25: U26.14@6663.14,5466.31 6734.8,5466.31 6835,5366.11 6980.11,5221 v1(7092,5221)
  Bottom Layer w6.25: v1(7092,5221) 7148.64,5221 J2.80@7149.24,5221.6
bMCU_GPIO70: J2.81 U26.16 | length 451.6
  Top Layer w6.25: U26.16@6663.14,5505.68 6664.3,5506.84 6719.84,5506.84 v1(6721,5508)
  Bottom Layer w6.25: v1(6721,5508) 6846.01,5382.99 6846.01,5327.99 6920.91,5253.09 J2.81@6976.01,5253.09
bMCU_GPIO72: J2.41 U28.2 | length 338
  Top Layer w6.25: U28.2@6663.19,4682 6663.24,4682.05 v1(6718,4682) v1(6718,4682)
  Bottom Layer w6.25: v1(6718,4682) 6718.9,4682.9 6854.1,4682.9 6913.83,4623.17 J2.41@6976.01,4623.17
bMCU_GPIO74: J2.43 U28.5 | length 349.4
  Top Layer w6.25: U28.5@6663.17,4741.02 6663.71,4741.57 6720.57,4741.57 v1(6721,4742)
  Bottom Layer w6.25: v1(6721,4742) 6819.1,4742 6906.43,4654.67 J2.43@6976.01,4654.67
bMCU_GPIO76: J1.44 U27.20 | length 516.4
  Top Layer w6.25: v1(4147.01,4873.1) 4267.82,4752.29 U27.20@4554.71,4752.28
  Bottom Layer w6.25: J1.44@4088.32,4873.1 v1(4147.01,4873.1)
bMCU_GPIO77: J2.25 U25.5 | length 386.6
  Top Layer w6.25: U25.5@6664.01,4192.45 6709.55,4192.45 v1(6710.75,4191.25)
  Bottom Layer w6.25: v1@6711.5,4190.5 6892.2,4371.2 J2.25@6976.01,4371.2
bMCU_GPIO78: J2.47 U28.11 | length 372.8
  Top Layer w6.25: U28.11@6664.2,4859.08 6665.75,4860.63 6717.63,4860.63 v1(6719,4862)
  Bottom Layer w6.25: v1(6719,4862) 6755.11,4862 6899.45,4717.66 J2.47@6976.01,4717.66
bMCU_GPIO79: J2.48 U28.12 | length 557.8
  Top Layer w6.25: U28.12@6663.14,4878.94 6933.17,4878.94 v1(7095.01,4717.1)
  Bottom Layer w6.25: v1(7095.01,4717.1) 7095.21,4716.9 J2.48@7153.83,4716.9
bMCU_GPIO80: J2.49 U28.13 | length 374.9
  Top Layer w6.25: U28.13@6663.86,4899.2 6663.93,4899.26 6710.21,4899.26 v1(6710.85,4899.9)
  Bottom Layer w6.25: v1(6710.85,4899.9) 6756.21,4899.9 6906.95,4749.16 J2.49@6976.01,4749.16
bMCU_GPIO81: J2.50 U28.14 | length 561.1
  Top Layer w6.25: U28.14@6663.14,4918.31 6924.8,4918.31 v1(7094.91,4748.2)
  Bottom Layer w6.25: v1(7094.91,4748.2) J2.50@7153.83,4748.2
bMCU_GPIO82: J2.51 U28.16 | length 386.2
  Top Layer w6.25: U28.16@6664.13,4957.79 6664.68,4958.34 6720.34,4958.34 v1(6721,4959)
  Bottom Layer w6.25: v1(6721,4959) 6721.27,4958.73 6739.38,4958.73 6917.46,4780.65 J2.51@6976.01,4780.65
bMCU_GPIO83: J2.52 U28.17 | length 573.1
  Top Layer w6.25: U28.17@6663.14,4977.36 6896.74,4977.36 v1(7095.01,4779.1)
  Bottom Layer w6.25: v1(7095.01,4779.1) 7095.6,4779.69 J2.52@7153.83,4779.69
bMCU_GPIO87: J2.56 U28.23 | length 594
  Top Layer w6.25: U28.23@6663.14,5096.1 6842.01,5096.1 v1(7093.91,4844.2)
  Bottom Layer w6.25: v1(7093.91,4844.2) J2.56@7152.83,4844.2
bMCU_GPIO88: J2.71 U26.2 | length 367.4
  Top Layer w6.25: U26.2@6664.86,5230.5 6664.9,5230.55 6717.55,5230.55 v1(6718,5231)
  Bottom Layer w6.25: v1(6718,5231) 6853.39,5095.61 J2.71@6976.01,5095.61
bMCU_GPIO89: J2.72 U26.3 | length 549.9
  Top Layer w6.25: U26.3@6663.14,5249.77 6750.23,5249.77 6904,5096 v1(7093.16,5096)
  Bottom Layer w6.25: v1(7093.16,5096) 7148.85,5096 J2.72@7149.24,5095.61
bMCU_GPIO90: J2.73 U26.5 | length 382.2
  Top Layer w6.25: U26.5@6663.14,5289.15 6664.46,5290.46 6708.69,5290.46 v1(6710.01,5291.78)
  Bottom Layer w6.25: v1(6710.01,5291.78) 6874.68,5127.11 J2.73@6976.01,5127.11
bMCU_GPIO91: J2.74 U26.6 | length 561.4
  Top Layer w6.25: U26.6@6663.14,5308.83 6725.28,5308.83 6906.11,5128 v1(7093.11,5128)
  Bottom Layer w6.25: v1(7093.11,5128) 7148.35,5128 J2.74@7149.24,5127.11
bMCU_GPIO92: J2.75 U26.8 | length 391.8
  Top Layer w6.25: U26.8@6663.93,5348.99 6664.04,5349.1 6720.1,5349.1 v1(6721,5350)
  Bottom Layer w6.25: v1(6721,5350) 6912.39,5158.61 J2.75@6976.01,5158.61
bMCU_GPIO93: J2.76 U26.9 | length 572.8
  Top Layer w6.25: U26.9@6663.14,5367.89 6737.11,5367.89 6946,5159 v1(7091.71,5159)
  Bottom Layer w6.25: v1(7091.71,5159) 7148.84,5159 J2.76@7149.24,5158.61
bMCU_GPIO94: J2.77 U26.11 | length 419.1
  Top Layer w6.25: U26.11@6663.14,5407.26 6664.51,5408.63 6719.63,5408.63 v1(6721,5410)
  Bottom Layer w6.25: v1(6721,5410) 6807.01,5323.99 6807.01,5299.99 6916.9,5190.1 J2.77@6976.01,5190.1
bMCU_GPIO95: J2.82 U26.17 | length 598.9
  Top Layer w6.25: U26.17@6663.14,5525.36 6738.64,5525.36 7010,5254 v1(7090.96,5254)
  Bottom Layer w6.25: v1(7090.96,5254) 7148.33,5254 J2.82@7149.24,5253.09
bMCU_GPIO101: J2.83 U26.19 | length 473.6
  Top Layer w6.25: U26.19@6663.14,5564.73 6663.27,5564.87 6720.87,5564.87 v1(6721,5565)
  Bottom Layer w6.25: v1(6721,5565) 6867,5419 6867,5343 6925.41,5284.59 J2.83@6976.01,5284.59
bMCU_GPIO102: J2.84 U26.20 | length 610.8
  Top Layer w6.25: U26.20@6663.14,5584.42 6733.58,5584.42 7034,5284 v1(7089,5284)
  Bottom Layer w6.25: v1(7089,5284) 7148.65,5284 J2.84@7149.24,5284.59
bMCU_GPIO103: J2.85 U26.22 | length 497
  Top Layer w6.25: U26.22@6663.14,5623.79 6663.75,5624.4 6712.4,5624.4 v1(6713,5625)
  Bottom Layer w6.25: v1(6713,5625) 6902,5436 6902,5341 6926.91,5316.09 J2.85@6976.01,5316.09
bMCU_GPIO104: J2.86 U26.23 | length 621.8
  Top Layer w6.25: U26.23@6663.14,5643.48 6729.52,5643.48 7057,5316 v1(7088,5316)
  Bottom Layer w6.25: v1(7088,5316) 7149.15,5316 J2.86@7149.24,5316.09
bMCU_GPIO121: J2.42 U28.3 | length 523.5
  Top Layer w6.25: U28.3@6663.14,4701.1 7016.01,4701.1 v1(7095.01,4622.1)
  Bottom Layer w6.25: v1(7095.01,4622.1) 7095.21,4621.9 J2.42@7153.83,4621.9
bMCU_GPIO133: J2.78 U26.12 | length 584.2
  Top Layer w6.25: U26.12@6663.14,5426.94 6739.06,5426.94 6975,5191 v1(7090.75,5191)
  Bottom Layer w6.25: v1(7090.75,5191) 7148.34,5191 J2.78@7149.24,5190.1
BOOT_1: R158.1 R162.2 R167.2 | length 151.4
  Top Layer w10: R158.1@6827.86,2952.14 6827.86,2960.14 6833.71,2954.29 v1(6867.69,2954.29)
  Bottom Layer w6.25: 6867.69,2944.35 v1(6867.69,2954.29) R162.2@6867.69,2978.31 6934.12,2978.31 R167.2@6934.69,2978.87
BOOT_2/CM_TX: J2.98 R168.2 | length 1867.9
  Top Layer w6.25: R168.2@5600.01,5086.63 5603.94,5086.63 5616.57,5099.25 5616.57,5131.78 5689.01,5204.22 5689.01,5261.99 v1(5688,5263)
  Signal layer 3 w6.25: v1(5688,5263) 5690.2,5265.2 6138.8,5265.2 6248,5156 6745,5156 v1(7093,5504)
  Bottom Layer w6.25: v1(7093,5504) 7148.17,5504 J2.98@7149.24,5505.06
C2C3_N: C8.1 R27.1 U1.P3 | length 799.8
  Top Layer w6: 4628.17,4552.41 4628.17,4551.86 4684.17,4495.86 v1(4686.32,4495.86) 4686.32,4497.54 4741.59,4552.81 C8.1@4741.86,4552.81
  Top Layer w6.25: v1(5280.96,4490.26) U1.P3@5296.7,4506.01
  Signal layer 3 w4: 5211.14,4474.74 5265.44,4474.74 v1(5280.96,4490.26)
  Signal layer 3 w6.25: v1@4687.15,4495.86 5114.36,4495.86 5143.38,4466.83 5203.23,4466.83 5211.14,4474.74
C2C3_P: C20.1 R26.1 U1.R3 | length 769.6
  Top Layer w6.25: 4627.18,4486.32 4641.65,4471.86 v1(4686.32,4471.86) 4728.02,4471.86 C20.1@4742.84,4486.67 ; v1(5280.96,4458.76) U1.R3@5296.7,4474.51
  Signal layer 3 w4: 5210.91,4443.01 5265.21,4443.01 v1(5280.96,4458.76)
  Signal layer 3 w6.25: v1(4686.32,4471.86) 4689.49,4471.86 4697.24,4479.61 5107.63,4479.61 5136.65,4450.58 5203.34,4450.58 5210.91,4443.01
C4C5_N: C9.1 R29.1 U1.P4 | length 789.9
  Top Layer w6.25: v1(5312.45,4490.26) U1.P4@5328.2,4506.01
  Signal layer 3 w4: 5211.14,4537.74 5287.78,4537.74 5297.08,4528.43 5297.08,4515.91 5312.45,4500.54 v1(5312.45,4490.26)
  Signal layer 3 w6.25: v1(4686.43,4561.32) 4689.61,4561.32 4693.91,4557.02 5183,4557.02 5192.52,4547.5 5202.29,4537.74 5211.14,4537.74
  Bottom Layer w6: v1(4686.43,4561.32) 4688.54,4563.43 4721.19,4563.43 C9.1@4723.04,4565.29
  Bottom Layer w6.25: R29.1@4630.14,4550.94 4640.52,4561.32 v1(4686.43,4561.32)